# Altium PCB Grid_Eye_PCB.PcbDoc
Units mil, origin at the board's own origin, x right, y up, seen from the top; angles counter-clockwise.
Board outline 2249 x 2100 mil, 2 copper layers (Top Layer, Bottom Layer); 70 components, 57 nets, 282 pads, 37 vias.
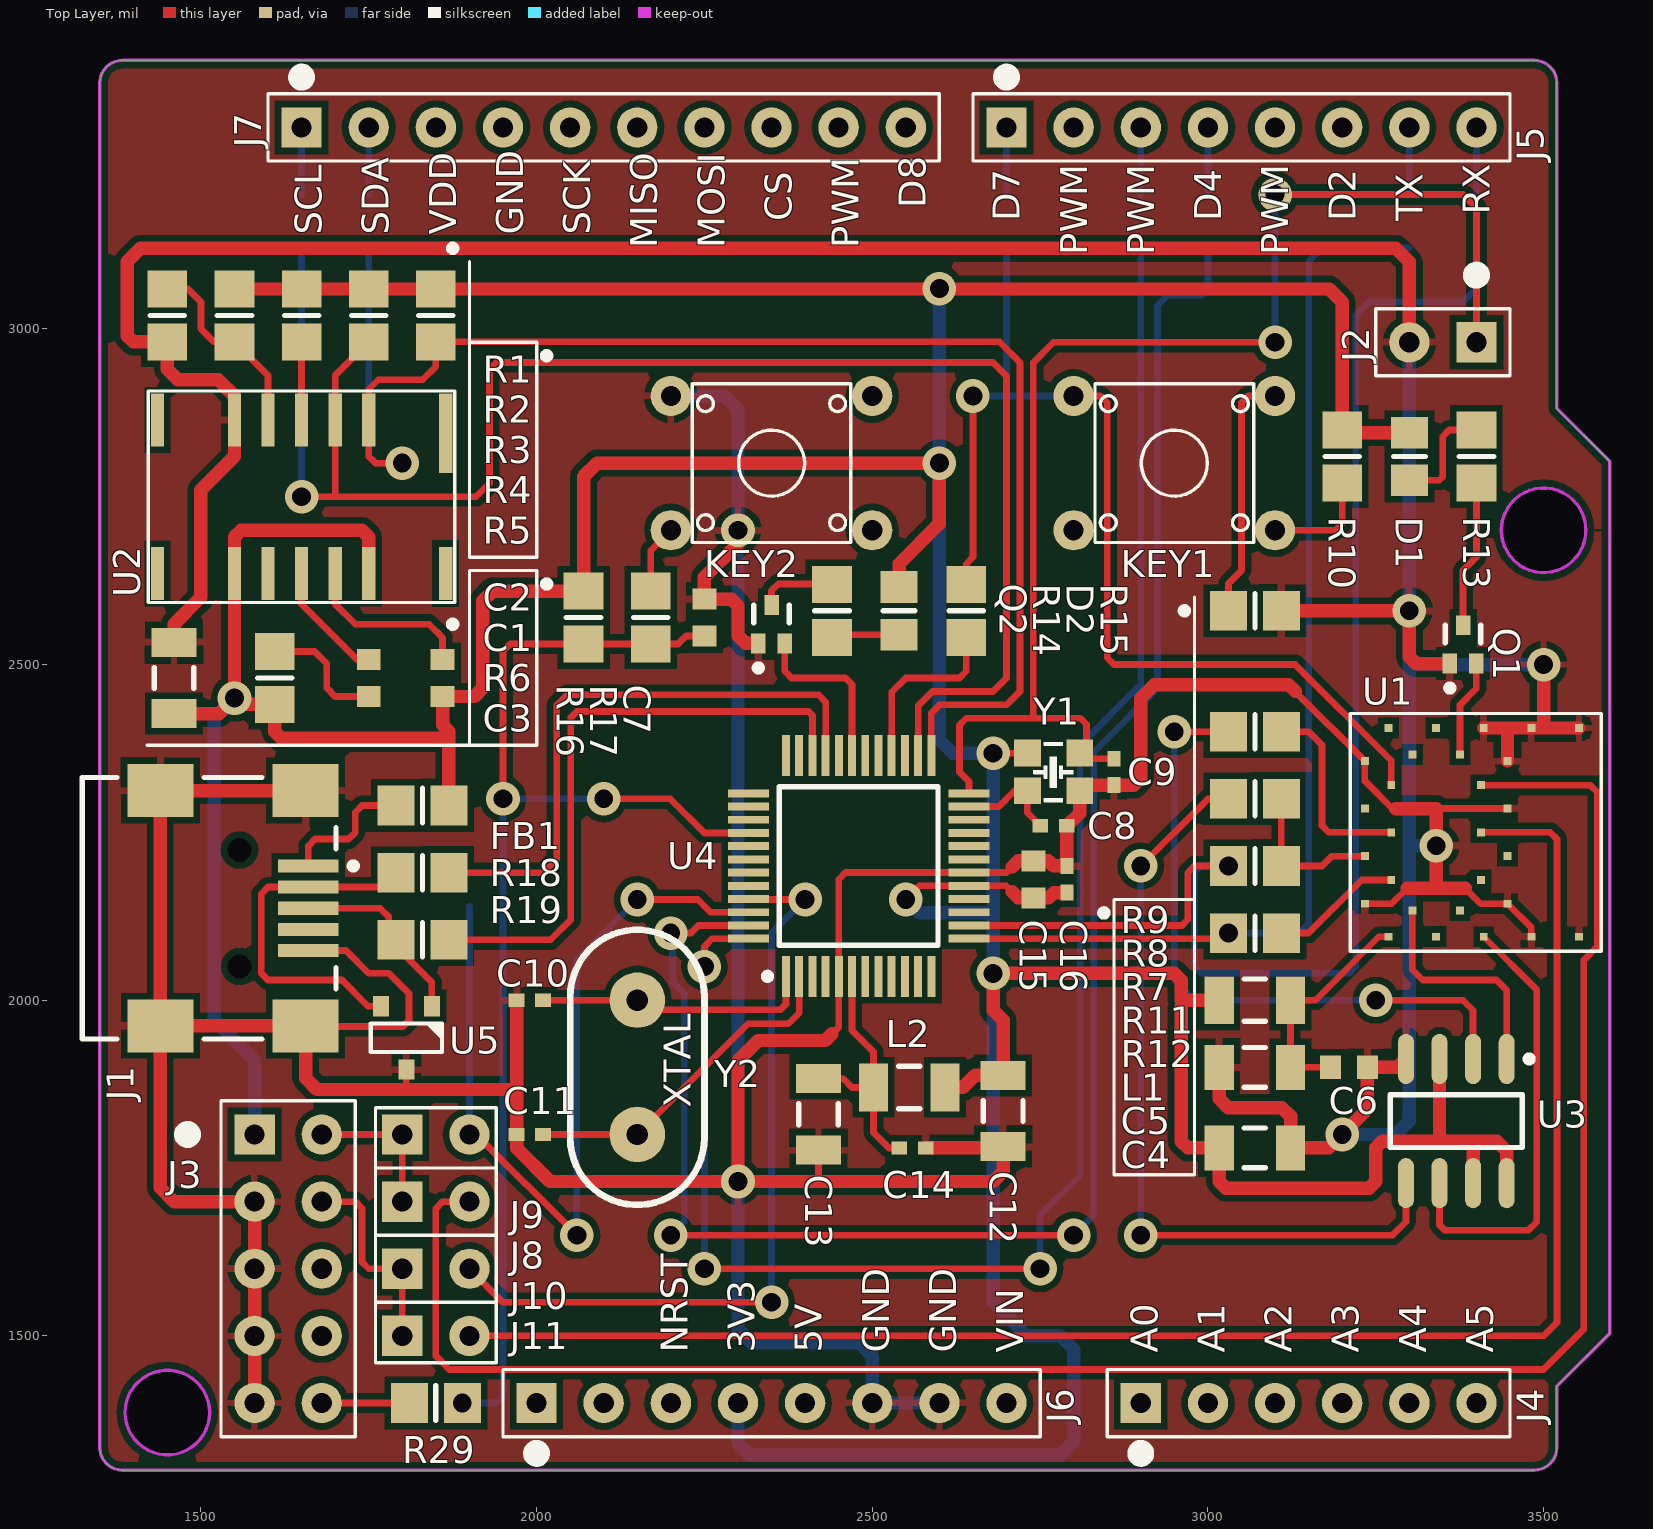
[diagram p0: Top Layer view]
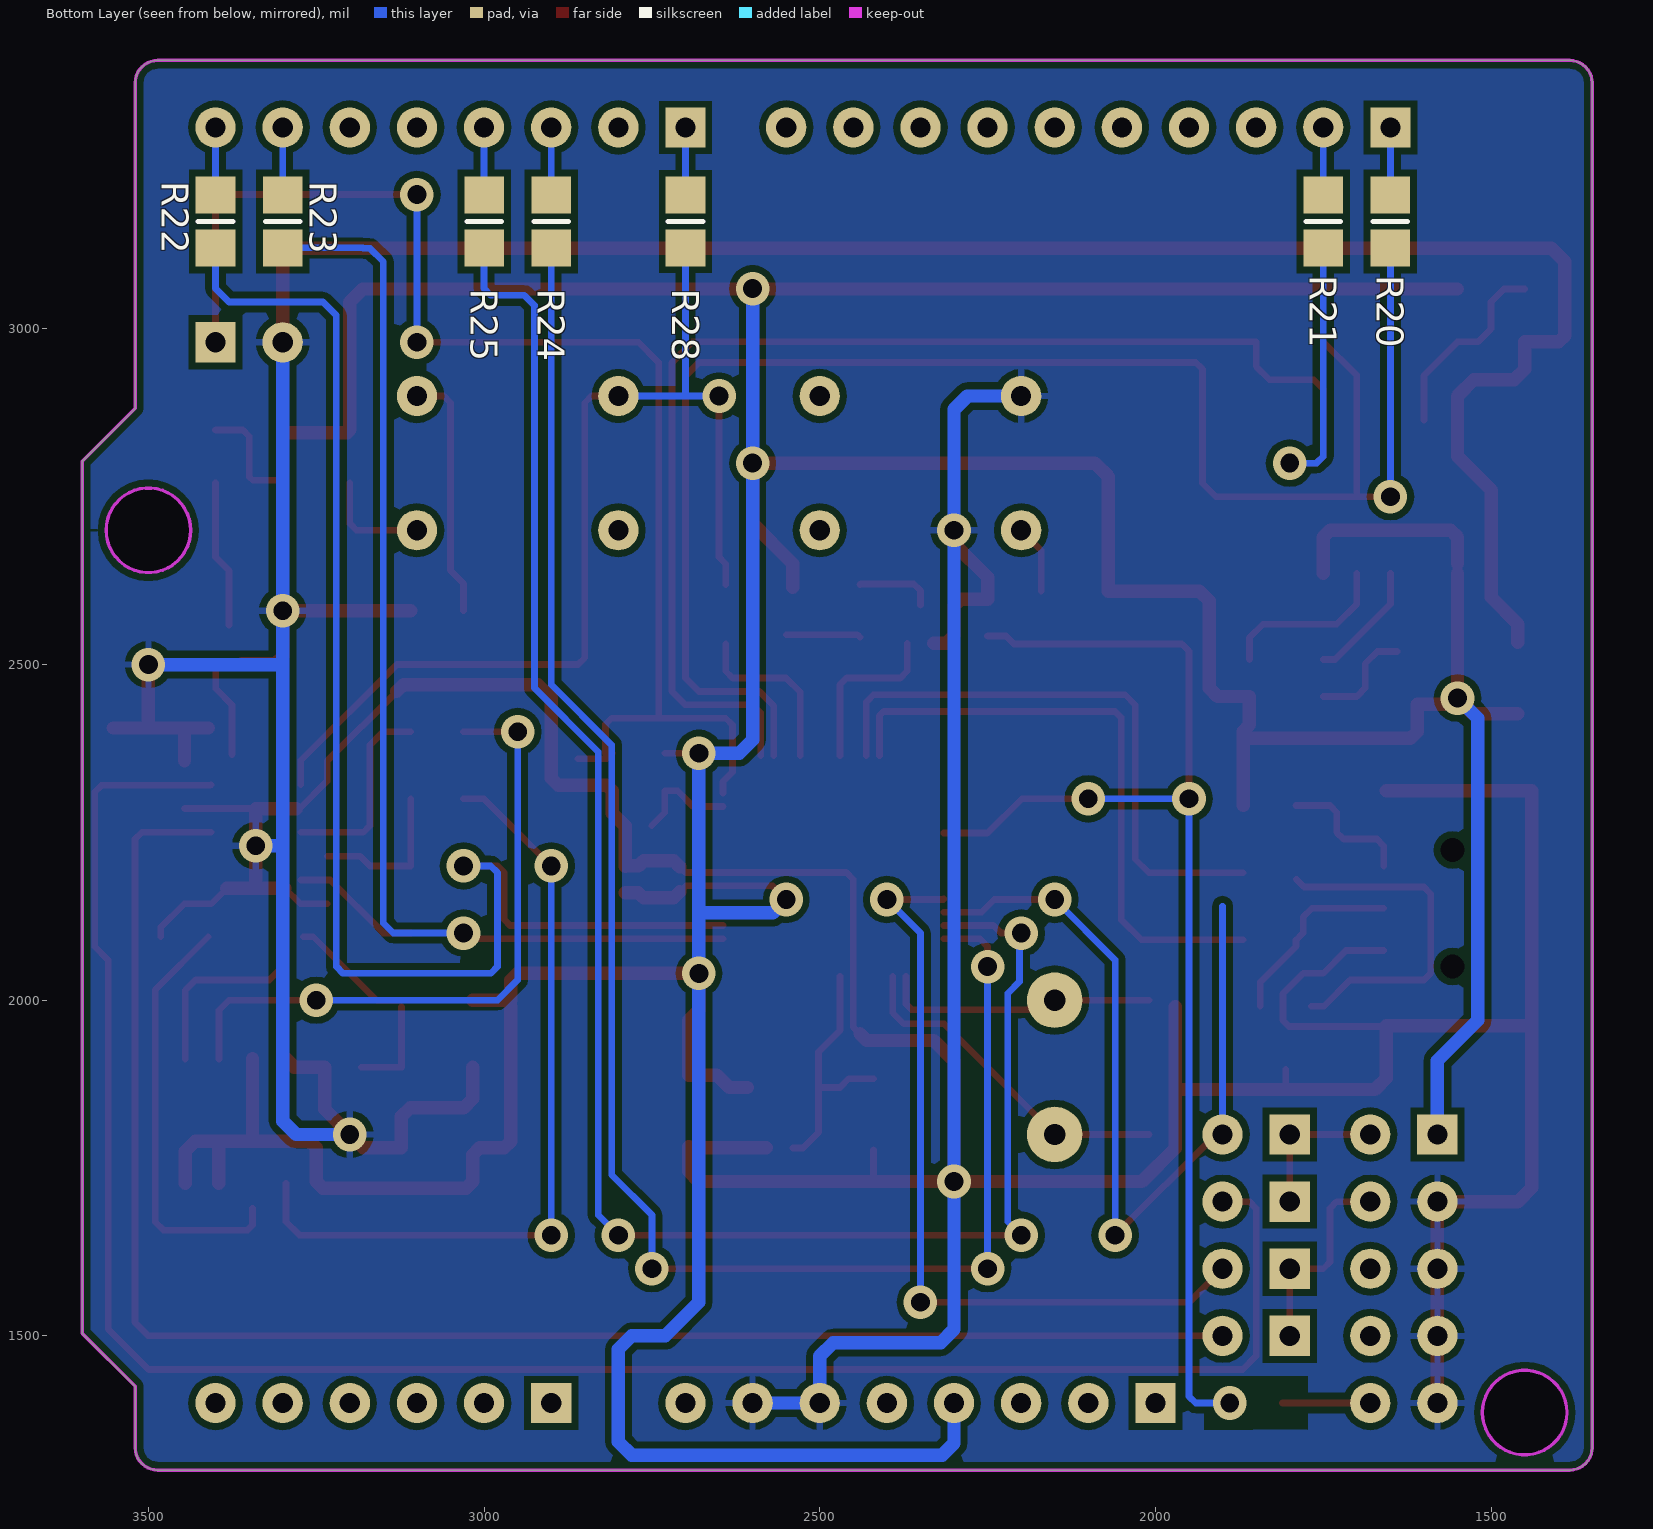
[diagram p1: Bottom Layer view, seen from below]

## Layer stack, top to bottom
Top Layer: signal copper 1.4
Dielectric: dielectric 12.6, FR-4, Dk 4.8
Bottom Layer: signal copper 1.4

## Board outline
1349.42,1333.6 ccw(c1383.02,1333.6) 1383.02,1300 3486.08,1300 ccw(c3486.08,1333.6) 3519.68,1333.6 3519.68,1424.8 3598.43,1503.54 3598.43,2802.76 3519.68,2881.5 3519.68,3366.4 ccw(c3486.08,3366.4) 3486.08,3400 1383.03,3400 ccw(c1383.03,3366.4) 1349.42,3366.4

## Design rules (kind name [scope] priority, off if disabled: settings)
Clearance GND [InNet('GND')] p1: gap=6
Clearance VCC [InNet('VCC')] p2: gap=6
Clearance [All] p3: gap=6
PolygonConnect [All] p1: connectstyle=Relief reliefconductorwidth=10 reliefentries=4 polygonreliefangle="90 Angle" airgapwidth=10
RoutingVias [All] p1: holewidth=28 width=50 viastyle="Through Hole" minholewidth=28 minwidth=50 maxholewidth=28 maxwidth=50
SolderMaskExpansion [All] p1: expansion=4
Width Width_1 [InNet('VCC')] p1: maxlimit=20 minlimit=6 preferedwidth=20 minimp=50.000000 maximp=50.000000 favimp=50.000000
Width [InNet('GND')] p2: maxlimit=20 minlimit=6 preferedwidth=20 minimp=50.000000 maximp=50.000000 favimp=50.000000
28 further rules are at their usual default settings.

## Components (designator, comment, footprint, x,y, rotation, side; value= is the part's Value field where it differs from the comment)
C1 "Cap Semi" 1608[0603] 1750,2480 r90 top
C2 "Cap Semi" 1608[0603] 1860,2480 r90 top
C3 "Cap Semi" C1206 1460,2480 r90 top
C4 "Cap Semi" C1206 3070,1780 r180 top
C5 "Cap Semi" C1206 3070,1900 r180 top
C6 "Cap Semi" 1608[0603] 3210,1900 r180 top
C7 "Cap Semi" 1608[0603] 2250,2570 r90 top
C8 "Cap Semi" 0402 2770,2260 r0 top
C9 "Cap Semi" 0402 2860,2340 r270 top
C10 "Cap Semi" 0402 1990,2000 r0 top
C11 "Cap Semi" 0402 1990,1800 r0 top
C12 "Cap Semi" C1206 2695,1835 r270 top
C13 "Cap Semi" C1206 2420,1830 r270 top
C14 "Cap Semi" 0402 2560,1780 r0 top
C15 "Cap Semi" 1608[0603] 2740,2180 r270 top
C16 "Cap Semi" 0402 2790,2180 r270 top
D1 "LED0" 6-0805_N 3300,2810 r270 top
D2 "LED0" 6-0805_N 2540,2580 r270 top
FB1 "SIP2" 6-0805_M 1830,2290 r0 top
J1 "Micro USB" "Micro USB" 1660,2200 r90 top
J2 "CN" CN2 3400,2980 r270 top
J3 "CN10" CN10 1580,1800 r0 top
J4 "SIP6" SIP6 2900,1400 r0 top
J5 "SIP8" SIP8 2700,3300 r0 top
J6 "SIP8" SIP8 2000,1400 r0 top
J7 "SIP10" SIP10 1650,3300 r0 top
J8 "SIP2" SIP2 1800,1700 r0 top
J9 "SIP2" SIP2 1800,1800 r0 top
J10 "SIP2" SIP2 1800,1600 r0 top
J11 "SIP2" SIP2 1800,1500 r0 top
KEY1 "Button" My_Button 2950,2800 r180 top
KEY2 "Button" My_Button 2350,2800 r0 top
L1 "Inductor" INDC3216 3070,2000 r180 top
L2 "Inductor" INDC3216 2555,1870 r180 top
Q1 "JFET-P" TO-18A 3380,2530 r0 top
Q2 "JFET-P" TO-18A 2350,2560 r0 top
R1 "Res1" 6-0805_M 1850,3020 r90 top
R2 "Res1" 6-0805_M 1750,3020 r90 top
R3 "Res1" 6-0805_M 1650,3020 r90 top
R4 "Res1" 6-0805_M 1550,3020 r90 top
R5 "Res1" 6-0805_M 1450,3020 r90 top
R6 "Res1" 6-0805_M 1610,2480 r90 top
R7 "Res1" 6-0805_M 3070,2300 r180 top
R8 "Res1" 6-0805_M 3070,2400 r180 top
R9 "Res1" 6-0805_M 3070,2580 r0 top
R10 "Res1" 6-0805_M 3200,2810 r90 top
R11 "Res1" 6-0805_M 3070,2200 r180 top
R12 "Res1" 6-0805_M 3070,2100 r180 top
R13 "Res1" 6-0805_M 3400,2810 r90 top
R14 "Res1" 6-0805_M 2440,2580 r90 top
R15 "Res1" 6-0805_M 2640,2580 r90 top
R16 "Res1" 6-0805_M 2070,2570 r270 top
R17 "Res1" 6-0805_M 2170,2570 r90 top
R18 "Res1" 6-0805_M 1830,2190 r180 top
R19 "Res1" 6-0805_M 1830,2090 r180 top
R20 "Res1" 6-0805_M 1650,3160 r270 bottom
R21 "Res1" 6-0805_M 1750,3160 r270 bottom
R22 "Res1" 6-0805_M 3400,3160 r270 bottom
R23 "Res1" 6-0805_M 3300,3160 r270 bottom
R24 "Res1" 6-0805_M 2900,3160 r270 bottom
R25 "Res1" 6-0805_M 3000,3160 r270 bottom
R28 "Res1" 6-0805_M 2700,3160 r270 bottom
R29 "Res1" 6-0805_M 1850,1400 r180 top
U1 "DA14580 BLE" PAN1740 3340,2250 r270 top
U2 "Grid Eye" Grid_Eye_Sensor 1650,2750 r270 top
U3 "W25X20CL" SO8_L 3370,1820 r270 top
U4 "ATMELD21G18" TQPF48 2480,2200 r90 top
U5 "TPD2EUSB" TPDEUSB30 1770,1990 r270 top
Y1 "XTAL" xtal1 2770,2340 r180 top
Y2 "16MHz" XTAL 2150,1800 r90 top

## Footprints (in the part's own frame and the unit in brackets; to place one, negate y for a bottom-side part, rotate by r counter-clockwise, add the part's x,y. Pads: shape width x height; smd on the part's side, far side on the other; paste and mask are expansions set on the pad)
6-0805_M [mm] "Chip Resistor, Body 2.0x1.2mm, IPC Low Density"
  rect 1.4x1.5 smd: 1(-1,0) 2(1,0)
  silkscreen extent 0,-0.65 0,0.65, body extent -1.07,-0.7 1.07,0.7, height 0.7
6-0805_N [mm] "Chip Resistor, Body 2.0x1.2mm, IPC Medium Density"
  rect 1.2x1.4 smd: 1(-0.9,0) 2(0.9,0)
  silkscreen extent 0,-0.6 0,0.6, body extent -1.07,-0.7 1.07,0.7, height 0.7
0402 [mm] "Chip Capacitor, Body 1.0x0.5mm, IPC High Density"
  rect 0.6x0.5 smd: 1(-0.5,0) 2(0.5,0)
  body extent -0.55,-0.3 0.55,0.3, height 1.3
1608[0603] [mm] "Chip Capacitor, Body 1.6x0.8mm, IPC High Density"
  rect 0.8x0.9 smd: 1(-0.7,0) 2(0.7,0)
  body extent -0.87,-0.48 0.87,0.48, height 1.3
C1206 [mm] "Chip Capacitor, Body 3.2x1.6mm, IPC High Density"
  rect 1.1x1.7 smd: 1(-1.35,0) 2(1.35,0)
  silkscreen extent -0.4,-0.75 0.4,0.75, body extent -1.7,-0.9 1.7,0.9, height 1.3
CN2 [mil] "Header 2 X 1"
  rect 60x60 hole 30: 1(0,0)
  round 60 hole 30: 2(0,-100)
  silkscreen extent -110,-150 50,50
CN10 [mil] "Header 5 X 2"
  rect 60x60 hole 30: 1(0,0)
  round 60 hole 30: 2(100,0) 3(0,-100) 4(100,-100) 5(0,-200) 6(100,-200) 7(0,-300) 8(100,-300) 9(0,-400) 10(100,-400)
  silkscreen extent -110,-450 150,50
Grid_Eye_Sensor [mm] "Grid Eye Sensor"
  rect 3x0.5 smd: 1(-2.4,5.45)
  rect 2x0.5 smd: 2(-2.9,2.54) 3(-2.9,1.27) 4(-2.9,0) 5(-2.9,-1.27) 6(-2.9,-2.54) 7(-2.9,-5.45) 8(2.9,-5.45) 9(2.9,-2.54) 10(2.9,-1.27) 11(2.9,0) 12(2.9,1.27) 13(2.9,2.54) 14(2.9,5.45)
  silkscreen extent -4,-5.8 4,5.8
INDC3216 [mm] "Chip Inductor, Body 3.2x1.6mm, IPC High Density"
  rect 1.1x1.8 smd: 1(-1.35,0) 2(1.35,0)
  silkscreen extent -0.4,-0.8 0.4,0.8, body extent -1.7,-0.9 1.7,0.9, height 0.55
"Micro USB" [mm] "Micro USB 5p"
  rect 0.5x2.3 smd: 1(0,0) 2(-0.8,0) 3(-1.6,0) 4(-2.4,0) 5(-3.2,0)
  rect 2x2.5 smd: 6(-6.05,0.1) 7(-6.05,5.6) 8(2.85,0.1) 9(2.85,5.6)
  round 0.6 hole 0.9 unplated: MH1(-3.8,2.6) MH2(0.6,2.6)
  silkscreen extent -6.55,-1.83 3.35,8.55
My_Button [mil] "My Botton 4 pins"
  round 60 hole 30: 1(-150,100) 2(150,100) 3(-150,-100) 4(150,-100)
  silkscreen extent -118,-118 118,118
PAN1740 [mm] "DA14580 BLE MODULE"
  rect 0.3x0.3 smd: 1(-2.7,-2.7) 2(-1.8,-1.7) 3(-0.9,-2.7) 4(0,-1.7) 5(0.9,-2.7) 6(1.8,-1.7) 7(2.7,-2.7) 8(3.95,-1.8) 9(2.95,-0.9) 10(3.95,0) 11(2.95,0.9) 12(3.95,1.8) 13(2.7,2.7) 14(1.8,1.7) 15(0.9,2.7) 16(0,1.7) 17(-0.9,2.7) 18(-1.8,1.7) 19(-2.7,2.7) 20(-3.95,1.8) 21(-2.95,0.9) 22(-3.95,0) 23(-2.95,-0.9) 24(-3.95,-1.8) A(-3.95,3.6) B(3.95,3.6) C(-3.95,5.4) D(3.95,5.4)
  silkscreen extent -4.5,-3.25 4.5,6.25
SIP2 [mil] "SIP2"
  rect 60x60 hole 30: 1(0,0)
  round 60 hole 30: 2(100,0)
SIP6 [mil] "SIP6"
  rect 60x60 hole 30: 1(0,0)
  round 60 hole 30: 2(100,0) 3(200,0) 4(300,0) 5(400,0) 6(500,0)
  silkscreen extent -50,-85 550,50
SIP8 [mil] "SIP8"
  rect 60x60 hole 30: 1(0,0)
  round 60 hole 30: 2(100,0) 3(200,0) 4(300,0) 5(400,0) 6(500,0) 7(600,0) 8(700,0)
  silkscreen extent -50,-50 750,85
SIP10 [mil] "SIP10"
  rect 60x60 hole 30: 1(0,0)
  round 60 hole 30: 2(100,0) 3(200,0) 4(300,0) 5(400,0) 6(500,0) 7(600,0) 8(700,0) 9(800,0) 10(900,0)
  silkscreen extent -50,-50 950,85
SO8_L [mm] "SOIC, 8-Leads, Body 4.9x3.9mm, Pitch 1.27mm, IPC High Density"
  oval 1.9x0.6 smd: 1(-2.35,1.905) 2(-2.35,0.635) 3(-2.35,-0.635) 4(-2.35,-1.905) 5(2.35,-1.905) 6(2.35,-0.635) 7(2.35,0.635) 8(2.35,1.905)
  silkscreen extent -2.47,-2.5 1,2.88, body extent -2,-2.5 2,2.5, height 1.75
TO-18A [mm] "SC-89; 3 Flat Leads; Body 1.6 x 1.6 x 0.7 mm, inc leads (LxWxH typ)"
  rect 0.55x0.75 smd: 1(-0.5,-0.725) 2(0.5,-0.725) 3(0,0.725)
  silkscreen extent -0.68,-1.77 0.67,0.72
TPDEUSB30 [mil] "TPDEUSB30"
  rect 30x24 smd: 1(-1,74) 2(-1,-2) 3(93,36)
  silkscreen extent 25,-17 67,89, body extent -9,-21 101,93, height 51
TQPF48 [mm] "F-QFP7x7-G48/N"
  rect 1.55x0.3 smd: 1(-4.177,2.756) 2(-4.177,2.256) 3(-4.177,1.756) 4(-4.177,1.256) 5(-4.177,0.756) 6(-4.177,0.256) 7(-4.177,-0.244) 8(-4.177,-0.744) 9(-4.177,-1.244) 10(-4.177,-1.744) 11(-4.177,-2.244) 12(-4.177,-2.744) 25(4.173,-2.744) 26(4.173,-2.244) 27(4.173,-1.744) 28(4.173,-1.244) 29(4.173,-0.744) 30(4.173,-0.244) 31(4.173,0.256) 32(4.173,0.756) 33(4.173,1.256) 34(4.173,1.756) 35(4.173,2.256) 36(4.173,2.756)
  rect 0.3x1.55 smd: 13(-2.752,-4.169) 14(-2.252,-4.169) 15(-1.752,-4.169) 16(-1.252,-4.169) 17(-0.752,-4.169) 18(-0.252,-4.169) 19(0.248,-4.169) 20(0.748,-4.169) 21(1.248,-4.169) 22(1.748,-4.169) 23(2.248,-4.169) 24(2.748,-4.169) 37(2.748,4.181) 38(2.248,4.181) 39(1.748,4.181) 40(1.248,4.181) 41(0.748,4.181) 42(0.248,4.181) 43(-0.252,4.181) 44(-0.752,4.181) 45(-1.252,4.181) 46(-1.752,4.181) 47(-2.252,4.181) 48(-2.752,4.181)
  silkscreen extent -4.3,-2.99 3,3.58
XTAL [mm] "XTAL"
  round 2.1 hole 0.8: 1(0,0) 2(5.08,0)
  silkscreen extent -2.66,-2.54 7.74,2.54
xtal1 [mil] "XTAL1"
  rect 40x40 smd: 1(39,28) 2(-39,28) 3(-39,-28) 4(39,-28)
  silkscreen extent -30,-44 30,44, body extent -49,-39 49,39, height 31

## Part data
C1 C2 C3 C4 C5 C6 C7 C8 C9 C10 C11 C12 C13 C14 C15 C16: "Capacitor (Semiconductor SIM Model)"
D1 D2: "Typical INFRARED GaAs LED"
J1: library part "Micro USB 5P", "Micro USB 5P"
J2: library part CN2, "My CN2"
J3: "My CN10"
KEY1 KEY2: library part My_Button, "My Button"
Q1 Q2: "P-Channel JFET"
R1 R2 R3 R4 R5 R6 R7 R8 R9 R10 R11 R12 R13 R14 R15 R16 R17 R18 R19 R20 R21 R22 R23 R24 R25 R28 R29: "Resistor"
U1: library part PAN1740, "DA14580 BLE MODULE"
U2: library part Grid_Eye_Sensor, "Grid Eye Sensor"
U4: library part AtmelD21G18A
U5: library part TPD2EUSB30, "TPD2EUSB30"
Y1: library part XATL1
Y2: library part XTAL, "XTAL"

## Free pads (board coordinates)
  round 125.98 hole 125.98: 0(1450,1385.83) 0(3500,2700)

## Via types
v1: diameter 50, hole 28, Top Layer to Bottom Layer, tented both sides, 37 vias

## Nets (pads, with @x,y where several pads share a name; then routed paths per layer and width w, separated by ;. In a path a pad name is that pad's centre, name@x,y a point inside that pad or via, vN(x,y) a via of type N, cw(c..) or ccw(c..) an arc to the next point about the centre after c; other vN are vias at no path point)
BLE_RST: KEY1.4 R15.2 R28.2 U1.2 | length 1612.1
  Top Layer w10: R15.2 2640,2650 2650,2660 v1(2650,2900) ; KEY1.4 2840,2900 2850,2890 2850,2510 2860,2500 3130,2500 3273.07,2356.93 U1.2
  Bottom Layer w10: v1(2650,2900) 2700,2900 ; R28.2 2700,2900 ; KEY1.4 2700,2900
BLE_SWCLK: J11.2 U1.16 | length 2465.5
  Top Layer w10: J11.2 3500,1500 3520,1520 3520,2240 3510,2250 U1.16
BLE_SWDIO: J8.2 U1.18 | length 3003.1
  Top Layer w10: J8.2 1860,1700 1850,1690 1850,1470 1870,1450 3500,1450 3560,1510 3560,2060 3580,2080 3580,2310 3570,2320 3407.8,2320 U1.18
G_INT: R3.1 U2.4 | length 116.5
  Top Layer w10: U2.4 R3.1
G_SCL: R2.1 R20.2 U2.3 U4.26 | length 2535.6
  Top Layer w10: v1(1650,2750) 1700,2750 ; R2.1 1700,2930.63 U2.3 1700,2750 ; U4.26 2568.36,2438.36 2590,2460 2680,2460 2700,2480 2700,2930 2680,2950 1940,2950 1930,2940 1930,2770 1910,2750 1700,2750
  Bottom Layer w10: v1(1650,2750) R20.2
G_SDA: R1.1 R21.2 U2.2 U4.25 | length 2251.5
  Top Layer w10: v1(1800,2800) 1760,2800 1750,2810 U2.2 1750,2910 1764.17,2924.17 1830,2924.17 1850,2944.17 R1.1 2690,2980.63 2690,2980 2720,2950 2720,2460 2700,2440 2600,2440 2588.04,2428.04 U4.25
  Bottom Layer w10: R21.2 1750,2810 1760,2800 v1(1800,2800)
GND: C3.2 C4.1 C5.2 C6.1 C7.2 C8.2 C9.2 C10.1 C11.1 C12.2 C13.2 C14.2 C15.1 C16.1 J1.5 J1.6 J1.7 J1.8 J1.9 J2.2 J3.3 J3.5 J3.7 J3.9 J6.6 J6.7 KEY2.1 Q1.1 Q2.1 R5.1 R9.2 U1.1 U1.7 U1.13 U1.17 U1.19 U1.20 U1.A U1.B U1.C U1.D U2.6 U3.4 U4.5 U4.18 U5.3 Y1.2 | length 13257
  Top Layer w10: J1.6 1656.87,1961 1801,1961 1810,1970 1810,2010 1780,2040 1750,2040 1715.98,2074.02 J1.5 ; 1806,1867 U5.3 ; 2420,1730 C13.2 ; 2440,1950 2450.25,1960.25 U4.5 2450.25,2180.25 2460.09,2190.09 U4.18 2700.09,2190.09 2708.83,2198.83 ; C16.1@2789.69,2200 C16.1 ; 3130,2460 U1.1 3233.7,2326.3 3274.57,2285.43 3280,2285.43 ; U1.7 3273.7,2143.7 3296.85,2166.85 ; 3340,2285.43 U1.17 ; 3383.15,2166.85 3406.3,2143.7 U1.13 3481.73,2108.27 U1.B
  Top Layer w20: C3.2 1460,2560 1500,2600 1500,2760 1550,2810 U2.6 1550,2900 1525.83,2924.17 1465.83,2924.17 1450,2940 R5.1 1399.37,2980.63 1390,2990 1390,3100 1410,3120 3280,3120 3300,3100 v1(3300,2980) ; J3.9 J3.7 J3.5 J3.3 1460,1700 1439.53,1720.47 J1.7 ; J1.8 J1.9 J1.7 ; 1970.32,1990 1970.32,1867 ; v1(2300,2700) 2300,2680 2250,2630 C7.2 2290,2597.56 2300,2587.56 2300,2542.91 2311.46,2531.46 Q2.1 ; 2440,1950 2430,1940 2330,1940 2300,1910 v1(2300,1730) ; C14.2 2693.15,1780 C12.2 2695,1745 2680,1730 2420,1730 v1(2300,1730) ; 2708.83,2198.83 2717.56,2207.56 C15.1 2762.44,2207.56 2770,2200 C16.1@2789.69,2200 ; C16.1 2790,2259.69 2809,2278.68 Y1.2 2817.31,2320.31 C9.2 2889.69,2320.31 2900,2330.63 2900,2450 2920,2470 3120,2470 3130,2460 ; C5.2 3016.85,1853.15 3030,1840 3110,1840 3123.15,1826.85 C4.1 3180,1780 v1(3200,1800) 3237.56,1837.56 C6.1 3282.48,1900 U3.4 ; R9.2 v1(3300,2580) 3300,2511.46 3310,2501.46 Q1.1 ; 3280,2285.43 3340,2285.43 v1(3340,2230) 3340,2166.85 ; 3296.85,2166.85 3340,2166.85 ; 3383.15,2166.85 3340,2166.85 ; U1.20 U1.A 3500,2405.51 ; U1.19 3446.3,2401.81 ; v1(3500,2500) 3500,2405.51 ; U1.C 3500,2405.51 ; J1.7 J1.6 1656.06,1883.94 1673,1867 1806,1867 1970.32,1867 ; 1970.32,1867 C11.1 1970.32,1779.68 2020,1730 v1(2300,1730)
  Bottom Layer w20: KEY2.1 2280,2900 2300,2880 v1(2300,2700) v1(2300,1730) 2300,1510 2320,1490 2480,1490 2500,1470 J6.6 J6.7 ; v1(3200,1800) 3280,1800 3300,1820 3300,2230 ; v1(3300,2980) v1(3300,2580) 3300,2500 ; v1(3340,2230) 3300,2230 ; v1(3500,2500) 3300,2500 ; 3300,2230 3300,2500
MCU_RST: C7.1 R16.2 R17.1 U4.40 | length 1870.5
  Top Layer w10: v1(1950,2300) 1950,2520 1960.63,2530.63 R16.2 R17.1 2210.63,2530.63 2222.44,2542.44 C7.1 ; v1(2100,2300) 2199.15,2300 2250,2249.15 U4.40
  Bottom Layer w10: v1(1889.37,1400) 1940,1400 1950,1410 v1(1950,2300) v1(2100,2300)
MCU_SWCLK: J10.2 U4.45 | length 1176.3
  Top Layer w10: J10.2 1950,1550 v1(2350,1550) ; U4.45 2316.13,2150 v1(2400,2150)
  Bottom Layer w10: v1(2350,1550) 2350,2100 v1(2400,2150)
MCU_SWDIO: J9.2 U4.46 | length 1272.7
  Top Layer w10: J9.2 1910,1800 v1(2060,1650) ; v1(2150,2150) 2240,2150 2258.96,2131.04 U4.46
  Bottom Layer w10: J9.2 1900,2140 ; v1(2060,1650) 2060,2060 v1(2150,2150)
NetC1_1: C1.1 R6.2 | length 159
  Top Layer w10: 1640,2519.37 1669.37,2519.37 1687.56,2501.18 1687.56,2464.88 1700,2452.44 C1.1
NetC1_2: C1.2 U2.11 | length 180
  Top Layer w10: U2.11 1650,2590 1732.44,2507.56 C1.2
NetC2_2: C2.2 U2.12 | length 259
  Top Layer w10: U2.12 1700,2590 1730,2560 1840,2560 1860,2540 C2.2
NetC5_1: C5.1 C6.2 L1.1 U1.8 | length 334.4
  Top Layer w10: L1.1@3123.15,1990 C5.1 C6.2 ; L1.1 3160,2000 3254.49,2094.49 U1.8
NetC8_1: C8.1 U4.23 Y1.1 | length 156.6
  Top Layer w10: U4.23 2688.52,2288.52 2712,2312 Y1.1 2731,2279.32 C8.1
NetC9_1: C9.1 J2.1 U4.24 Y1.3 | length 2032.7
  Top Layer w10: U4.24 2644.14,2325.86 2630,2340 2630,2410 2640,2420 2740,2420 ; Y1.3 2817.32,2359.68 C9.1 ; Y1.3@2819,2368 2819,2411 2810,2420 2740,2420 ; v1(3100,2980) 2770,2980 2740,2950 2740,2420 ; v1(3100,3200) 3380,3200 3400,3180 J2.1
  Bottom Layer w10: v1(3100,2980) v1(3100,3200)
NetC10_2: C10.2 U4.1 Y2.2 | length 412.4
  Top Layer w10: C10.2 Y2.2 2164,1986 2363.37,1986 2371.51,1994.13 U4.1
NetC11_2: C11.2 U4.2 Y2.1 | length 510.9
  Top Layer w10: C11.2 Y2.1 2315,1965 2375,1965 2391.19,1981.19 U4.2
NetC13_1: C13.1 C14.1 L2.2 U4.6 | length 381
  Top Layer w10: C13.1 2456.85,1883.15 2470,1870 L2.2 ; U4.6 2469.93,1955.07 2501.85,1923.15 L2.2 ; C14.1 2525,1780 2501.85,1803.15 L2.2
NetD1_2: D1.2 R13.2 | length 166.1
  Top Layer w10: D1.2 3344.57,2774.57 3350,2780 3350,2840 3359.37,2849.37 R13.2
NetD2_2: D2.2 R14.1 | length 111.6
  Top Layer w10: R14.1 2443.94,2544.57 D2.2@2550,2544.57
NetFB1_1: FB1.1 J1.1 | length 203.1
  Top Layer w10: J1.1 1660,2230 1670,2240 1720,2240 1730,2250 1730,2280 1740,2290 FB1.1
NetJ1_2: J1.2 R18.2 U5.2 | length 525.7
  Top Layer w10: U5.2 1749,1991 1710,2030 1600,2030 1590,2040 1590,2158.51 1600,2168.51 J1.2 1778.51,2168.51 R18.2@1790,2180
NetJ1_3: J1.3 R19.2 U5.1 | length 285.5
  Top Layer w10: J1.3 1767.01,2137.01 1780,2124.02 1780,2100 R19.2@1790.63,2089.37 ; R19.2 R19.2@1790.63,2089.37 ; U5.1 1844,2026.63 1790.63,2080 R19.2@1790.63,2089.37
NetJ3_2: J3.2 J8.1 J9.1 | length 230
  Top Layer w10: J3.2@1670,1800 J9.1 J8.1
NetJ3_4: J3.4 J10.1 J11.1 | length 318.3
  Top Layer w10: J3.4@1670,1700 1730,1700 1740,1690 1740,1610 1750,1600 J10.1 J11.1
NetJ3_10: J3.10 R29.2 | length 130.6
  Top Layer w10: J3.10 R29.2
NetJ5_1: J5.1 R28.1 | length 100.6
  Bottom Layer w10: R28.1 J5.1
NetJ5_3: J5.3 R24.1 | length 100.6
  Bottom Layer w10: R24.1 J5.3
NetJ5_4: J5.4 R25.1 | length 100.6
  Bottom Layer w10: R25.1 J5.4
NetJ5_7: J5.7 R23.1 | length 100.6
  Bottom Layer w10: R23.1 J5.7
NetJ5_8: J5.8 R22.1 | length 100.6
  Bottom Layer w10: R22.1 J5.8
NetJ7_1: J7.1 R20.1 | length 100.6
  Bottom Layer w10: R20.1 J7.1
NetJ7_2: J7.2 R21.1 | length 100.6
  Bottom Layer w10: R21.1 J7.2
NetKEY1_1: KEY1.1 R10.1 | length 164.8
  Top Layer w10: KEY1.1 3190,2700 3200,2710 R10.1
NetKEY1_3: KEY1.3 R9.1 | length 372.2
  Top Layer w10: R9.1 3030.63,2620.63 3050,2640 3050,2890 3060,2900 KEY1.3
NetKEY2_3: KEY2.3 R17.2 | length 103.1
  Top Layer w10: R17.2 2170,2670 KEY2.3
NetQ1_2: Q1.2 U1.21 | length 145.4
  Top Layer w10: U1.21 3375.43,2440 3399.68,2464.25 Q1.2
NetQ1_3: Q1.3 R13.1 | length 220.4
  Top Layer w10: Q1.3 3380,2640 3400,2660 R13.1
NetQ2_2: Q2.2 U4.31 | length 255.7
  Top Layer w10: Q2.2 2369.68,2490 2370,2490 2380,2480 2460,2480 2469.93,2470.07 U4.31
NetQ2_3: Q2.3 R14.2 | length 115.9
  Top Layer w10: Q2.3 2350,2610 2360,2620 2439.37,2620 R14.2
NetR4_1: R4.1 R5.2 U2.5 | length 293.2
  Top Layer w10: R5.2 1480.63,3059.37 1500,3040 1500,3000 1519.37,2980.63 R4.1 1600,2930.63 U2.5
NetR7_1: R7.1 R11.1 U1.5 | length 230.4
  Top Layer w10: R7.1 R11.1 3170,2200 3184.57,2214.57 U1.5
NetR7_2: R7.2 U3.5 | length 1182.8
  Top Layer w10: v1(2900,1650) 3275,1650 3295,1670 U3.5 ; v1(2900,2200) 3000,2300 R7.2
  Bottom Layer w10: v1(2900,1650) v1(2900,2200)
NetR8_1: R8.1 U1.4 | length 296.1
  Top Layer w10: R8.1 3150,2400 3170,2380 3170,2260 3180,2250 U1.4
NetR8_2: R8.2 U3.2 | length 986.7
  Top Layer w10: v1(2950,2400) R8.2 ; v1(3250,2000) 3380,2000 3395,1985 U3.2
  Bottom Layer w10: v1(2950,2400) 2950,2030 2980,2000 v1(3250,2000)
NetR12_1: R12.1 U1.6 | length 196.5
  Top Layer w10: R12.1 3150,2100 3229.13,2179.13 U1.6
NetR15_1: R15.1 U4.28 | length 259.2
  Top Layer w10: U4.28 2528.99,2458.99 2550,2480 2630,2480 2640,2490 R15.1@2640,2530.63
NetR18_1: R18.1 U4.33 | length 890.2
  Top Layer w10: R18.1 2010,2190 2030,2210 2030,2440 2045,2455 2420,2455 2430.56,2444.44 U4.33
NetR19_1: R19.1 U4.34 | length 920.9
  Top Layer w10: R19.1 2021,2090 2051,2120 2051,2421 2060,2430 2405,2430 2410.88,2424.12 U4.34
NetU1_9: U1.9 U3.1 | length 343.9
  Top Layer w10: U1.9 3304.57,2045.43 3320,2030 3430,2030 3445,2015 U3.1
NetU1_12: U1.12 U3.6 | length 635.6
  Top Layer w10: 3345,1690 3345,1665 3352.5,1657.5 3477.5,1657.5 3490,1670 3490,2015.35 U1.12
RX: R11.2 R22.2 U4.14 | length 2134.5
  Top Layer w10: U4.14 2961.35,2111.35 2970,2120 2970,2190 2980,2200 v1(3030.63,2200)
  Bottom Layer w10: v1(3030.63,2200) 2990,2200 2980,2190 2980,2050 2990,2040 3210,2040 3220,2050 3220,3020 3240,3040 3380,3040 3400,3060 R22.2
RX1: R24.2 U4.48 | length 2633
  Top Layer w10: v1(2250,1600) v1(2750,1600) ; v1(2250,2050) 2250,2080 2261.67,2091.67 U4.48
  Bottom Layer w10: v1(2250,1600) v1(2250,2050) ; v1(2750,1600) 2750,1680 2810,1740 2810,2380 2900,2470 R24.2
TX: R12.2 R23.2 U4.13 | length 1659.2
  Top Layer w10: U4.13 3022.3,2091.67 v1(3030.63,2100)
  Bottom Layer w10: v1(3030.63,2100) 3135.32,2100 3150,2114.68 3150,3100 3170,3120 3180,3120 3180.63,3120.63 R23.2
TX1: R25.2 U4.47 | length 2769.4
  Top Layer w10: v1(2200,1650) v1(2800,1650) ; v1(2200,2100) 2230,2100 2241.35,2111.35 U4.47
  Bottom Layer w10: v1(2200,1650) 2220,1670 2220,2010 2202.34,2027.66 2202.34,2097.66 v1(2200,2100) ; v1(2800,1650) 2830,1680 2830,2370 2925,2465 2925,3035 2940,3050 2990,3050 3000,3060 R25.2
VCC: C2.1 C3.1 C4.2 C12.1 C15.2 C16.2 D1.1 D2.1 FB1.2 J3.1 J6.4 L1.2 L2.1 R1.2 R2.2 R3.2 R4.2 R6.1 R10.2 R16.1 U2.9 U2.13 U3.3 U3.7 U3.8 U4.17 Y1.4 | length 9578.9
  Top Layer w10: U2.9 U2.9@1550,2650 ; v1(2550,2150) 2570.41,2170.41 U4.17 2699.59,2170.41 2708.57,2161.43 ; v1(2680,2368) Y1.4
  Top Layer w20: C3.1 1526.85,2426.85 1540.63,2440.63 R6.1 1610,2400 1620,2390 1858.74,2390 1869.37,2400.63 ; v1(1550,2450) U2.9 ; U2.9@1550,2650 1550,2690 1560,2700 1740,2700 1750,2690 U2.13 ; R4.2 R3.2 R2.2 R1.2 3180.63,3059.37 3200,3040 R10.2 3203.94,2845.43 D1.1 ; FB1.2 1869.37,2400.63 ; D2.1 2540,2650 2600,2710 v1(2600,2800) 2090,2800 2070,2780 R16.1 1934.37,2609.37 1920,2595 1920,2465 1907.44,2452.44 C2.1 1860,2410 1869.37,2400.63 ; L2.1 2635,1870 2653.15,1888.15 C12.1 2695,1970 2680,1985 v1(2680,2040) 2950,2040 2960,2030 2960,2000 L1.2 ; 2708.57,2161.43 2717.56,2152.44 C15.2 2762.44,2152.44 2770.31,2160.31 C16.2 ; 2960,1990 2960,1790 2970,1780 3006.85,1780 3016.85,1770 3016.85,1730 3026.85,1720 3240,1720 3250,1730 3250,1780 3260,1790 3340,1790 ; U3.3 3345,1795 3340,1790 ; U3.7 3395,1780 ; U3.8 3445,1775 3430,1790 3340,1790
  Bottom Layer w20: v1(1550,2450) 1520,2420 1520,2239.32 1519.92,2239.24 1519.92,2034.7 1520,2034.62 1520,1970 1580,1910 J3.1 ; J6.4 2300,1340 2317.5,1322.5 2780,1322.5 2800,1342.5 2800,1480 2780,1500 2730,1500 2680,1550 v1(2680,2040) 2680,2130 ; v1(2550,2150) 2570,2130 2680,2130 ; v1(2600,3060) v1(2600,2800) 2600,2388 2620,2368 v1(2680,2368) 2680,2130
pads on no net: J1.4 J1.MH1 J1.MH2 J3.6 J3.8 J4.1 J4.2 J4.3 J4.4 J4.5 J4.6 J5.2 J5.5 J5.6 J6.1 J6.2 J6.3 J6.5 J6.8 J7.3 J7.4 J7.5 J7.6 J7.7 J7.8 J7.9 J7.10 KEY1.2 KEY2.2 KEY2.4 R29.1 U1.3 U1.10 U1.11 U1.14 U1.15 U1.22 U1.23 U1.24 U2.1 U2.7 U2.8 U2.10 U2.14 U4.3 U4.4 U4.7 U4.8 U4.9 U4.10 U4.11 U4.12 U4.15 U4.16 U4.19 U4.20 U4.21 U4.22 U4.27 U4.29 U4.30 U4.32 U4.35 U4.36 U4.37 U4.38 U4.39 U4.41 U4.42 U4.43 U4.44

## Polygon pours and split planes (outlines as drawn)
GND on Top Layer "Keep-Out Layer-No Net" (solid, remove dead copper, pour order 4): 1350,3400 1350,1300 3520,1300 3520,1424.49 3519.68,1424.8 3598.43,1503.54 3598.43,2802.76 3519.68,2881.5 3519.68,3399.68 3520,3400
GND on Bottom Layer "Keep-Out Layer-No Net" (solid, remove dead copper, pour order 2): 1383.03,3400 1350,3400 1350,1300 3520,1300 3520,1424.49 3519.68,1424.8 3598.43,1503.54 3598.43,2802.76 3519.68,2881.5 3519.68,3399.68 3520,3400

## Keep-outs
Keep-Out Layer:
  circle w5: c3500,2700 r62.99
  circle w5: c1450,1385.83 r62.99
  lines w5: 1349.42,1333.6 ccw(c1383.02,1333.6) 1383.02,1300 3486.08,1300 ccw(c3486.08,1333.6) 3519.68,1333.6 3519.68,1424.8 3598.43,1503.54 3598.43,2802.76 3519.68,2881.5 3519.68,3366.4 ccw(c3486.08,3366.4) 3486.08,3400 1383.03,3400 ccw(c1383.03,3366.4) 1349.42,3366.4 1349.42,1333.6

## Silkscreen, mask and mechanical layers (free items; w line width, h text height)
Top Overlay:
  circle w10: c1875,2560 r5
  circle w10: c2015,2620 r5
  circle w10: c2015,2960 r5
  circle w10: c1875,3120 r5
  circle w10: c2845,2130 r5
  circle w10: c2965,2580 r5
  lines w5: 1420,2380 1900,2380 1900,2580 1900,2640 2000,2640 2000,2380 1895,2380 ; 1760,1550 1940,1550 ; 1760,1650 1940,1650 ; 1760,1750 1940,1750 ; 1900,2980 2000,2980 2000,2660 1900,2660 1900,2920 1900,3100 ; 2980,2600 2980,2150 ; 2980,2150 2980,1740 2860,1740 2860,2150 2980,2150 ; 1760,1460 1940,1460 1940,1840 1760,1840 1760,1460 ; 1950,1350 1950,1450 2750,1450 2750,1350 1950,1350 ; 2650,3250 2650,3350 3350,3350 3450,3350 3450,3325 3450,3250 3350,3250 2650,3250 ; 2850,1350 2850,1450 3450,1450 3450,1350 2850,1350
  text "D8" at 2580,3180 h40 r90
  text "RX" at 3420,3170 h40 r90
  text "CS" at 2380,3160 h40 r90
  text "D7" at 2720,3160 h40 r90
  text "D4" at 3020,3160 h40 r90
  text "D2" at 3220,3160 h40 r90
  text "TX" at 3320,3160 h40 r90
  text "SCL" at 1680,3140 h40 r90
  text "SDA" at 1780,3140 h40 r90
  text "VDD" at 1880,3140 h40 r90
  text "GND" at 1980,3140 h40 r90
  text "SCK" at 2080,3140 h40 r90
  text "MISO" at 2180,3120 h40 r90
  text "MOSI" at 2280,3120 h40 r90
  text "PWM" at 2480,3120 h40 r90
  text "PWM" at 2820,3110 h40 r90
  text "PWM" at 2920,3110 h40 r90
  text "PWM" at 3120,3110 h40 r90
  text "NRST" at 2225,1475 h40 r90
  text "3V3" at 2325,1475 h40 r90
  text "5V" at 2425,1475 h40 r90
  text "GND" at 2525,1475 h40 r90
  text "GND" at 2625,1475 h40 r90
  text "VIN" at 2725,1475 h40 r90
  text "A0" at 2925,1475 h40 r90
  text "A1" at 3025,1475 h40 r90
  text "A2" at 3125,1475 h40 r90
  text "A3" at 3225,1475 h40 r90
  text "A4" at 3325,1475 h40 r90
  text "A5" at 3425,1475 h40 r90
Top Paste:
  drawing of 456 lines, arcs and shapes, not listed

## Text inside footprints (layer, text, board x,y; h text height)
J1: Mechanical 1 "PCB Edge" at 1333.93,2295.92 h9.84 r270
Y2: Top Overlay "XTAL" at 2230,1840 h40 r90